# Altium PCB ПСПД.PcbDoc
Units mm, origin at the board's own origin, x right, y up, seen from the top; angles counter-clockwise.
Board outline 111.12 x 93.09 mm, 2 copper layers (Top Layer, Bottom Layer); 30 components, 43 nets, 172 pads, 2 vias.
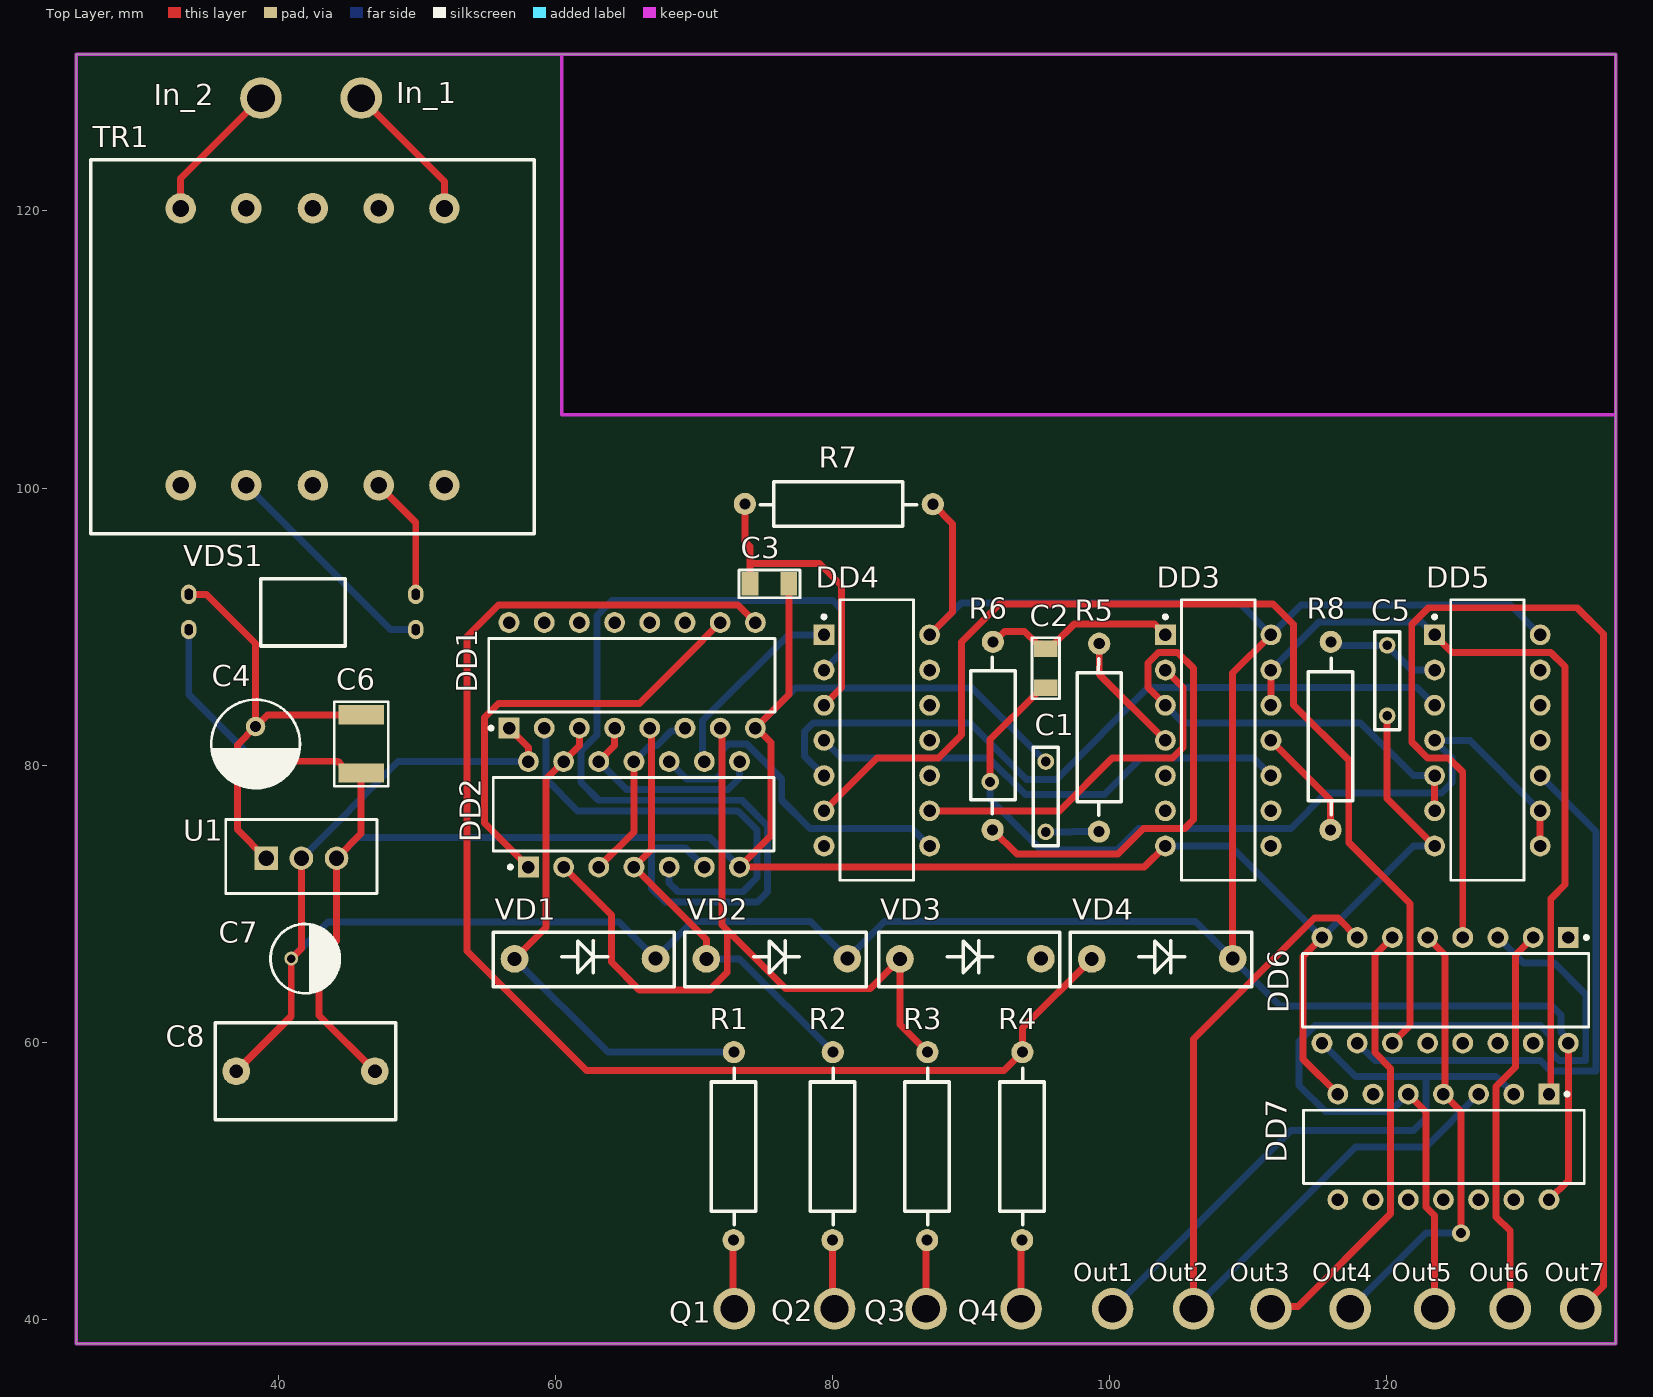
[diagram p0: Top Layer view]
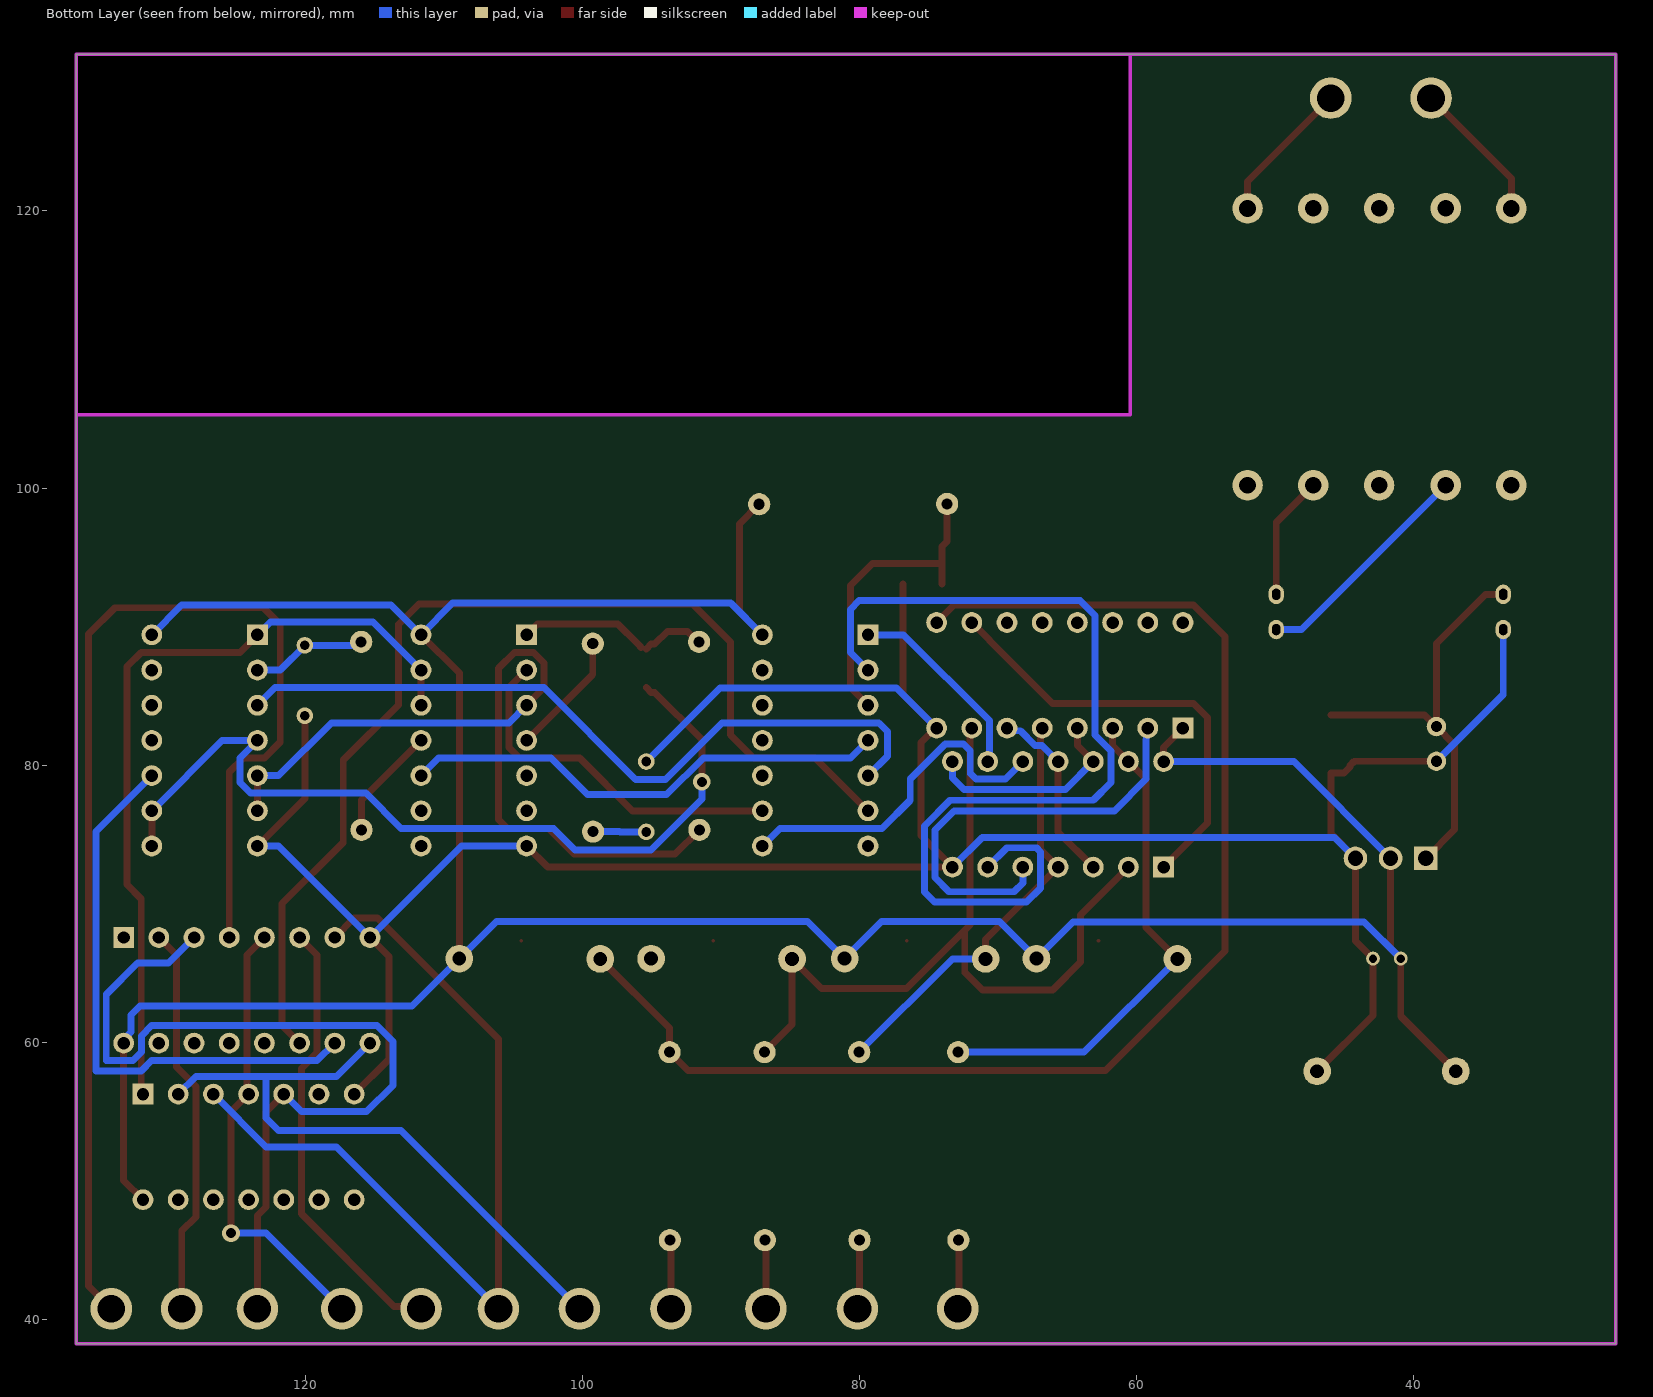
[diagram p1: Bottom Layer view, seen from below]
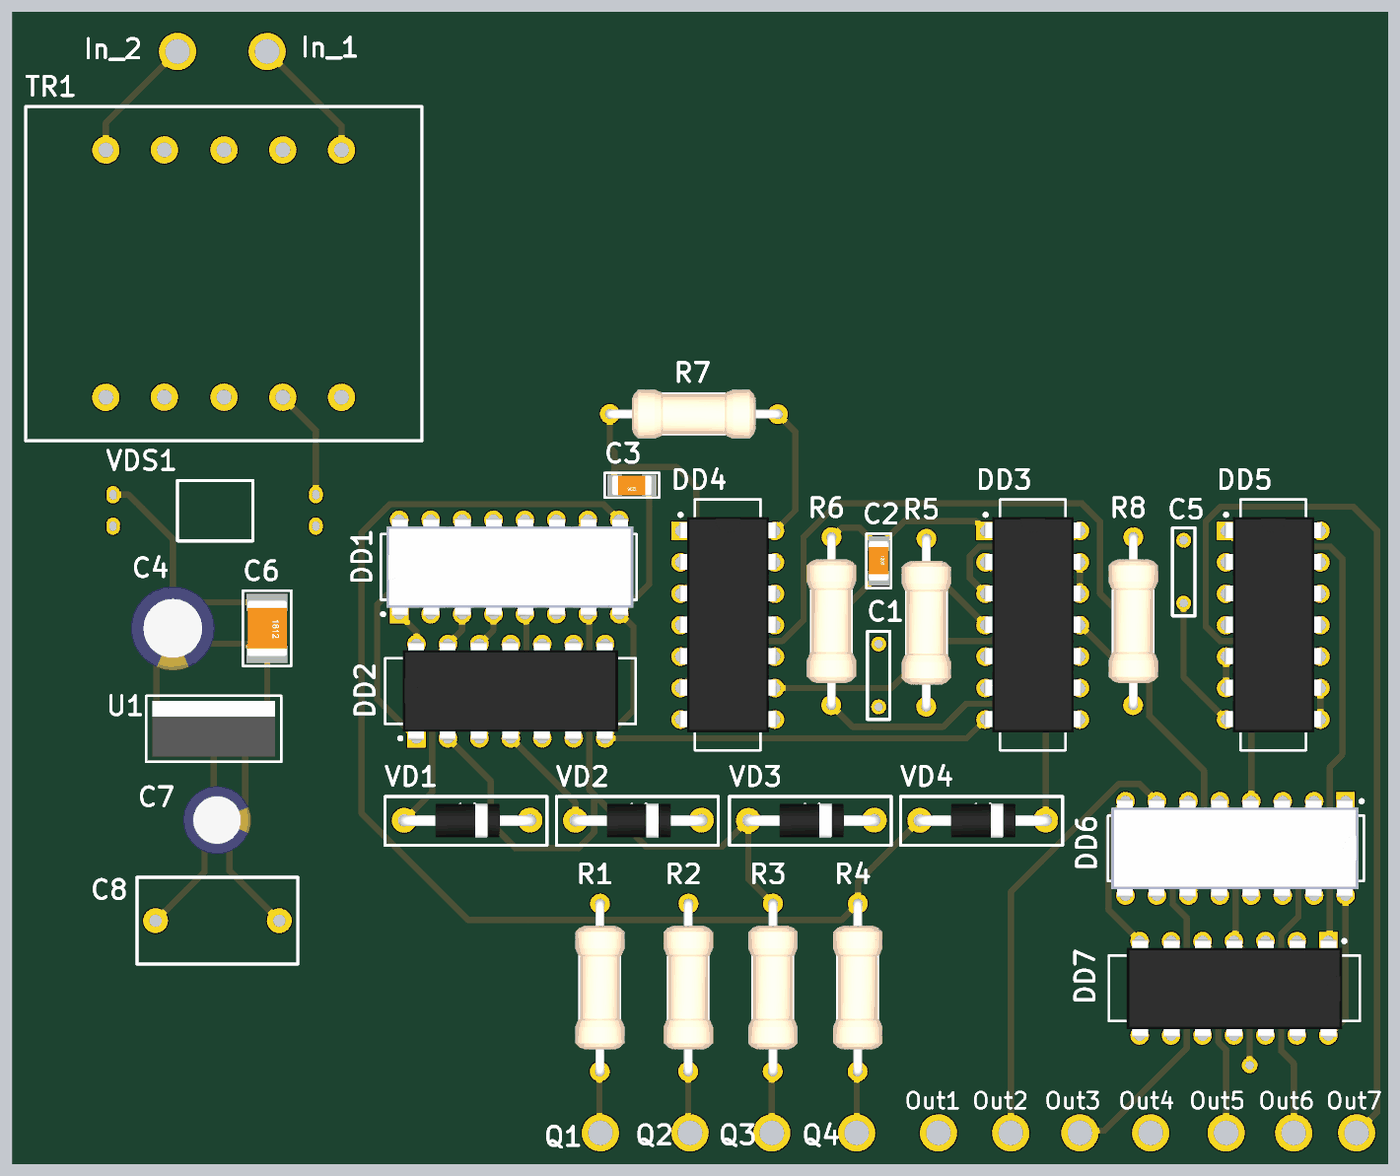
[diagram p2: 3D render of the assembled board from above, using the file's embedded part models]

## Layer stack, top to bottom
Top Solder: solder mask 0.0102, Solder Resist, Dk 3.5
Top Layer: signal copper 0.0356
Dielectric 1: dielectric 0.32, FR-4, Dk 4.8
Bottom Layer: signal copper 0.0356
Bottom Solder: solder mask 0.0102, Solder Resist, Dk 3.5

## Board outline
25.4,38.227 136.525,38.227 136.525,131.318 25.4,131.318
cut-out: 60.452,105.283 60.452,131.318 136.525,131.318 136.525,105.283

## Design rules (kind name [scope] priority, off if disabled: settings)
Clearance [All] p1: gap=0.254 ignorepadtopadclearanceinfootprint=FALSE
Height [All] p1: minheight=0 maxheight=40 prefheight=12.7
PolygonConnect [All] p1: connectstyle=Relief reliefconductorwidth=0.254 reliefentries=4 polygonreliefangle="90 Angle" airgapwidth=0.254
RoutingVias [All] p1: holewidth=0.711 width=1.27 viastyle="Through Hole" minholewidth=0.711 minwidth=1.27 maxholewidth=0.711 maxwidth=1.27
SolderMaskExpansion [All] p1: expansion=0.102 istentingtop=FALSE
Width [All] p1: maxlimit=0.5 minlimit=0.5 preferedwidth=0.5 minimp=50.000000 maximp=50.000000 favimp=50.000000
29 further rules are at their usual default settings.

## Components (designator, comment, footprint, x,y, rotation, side; value= is the part's Value field where it differs from the comment)
C1 "160пФ" 160пФ 95.377,75.184 r90 top
C2 "9.1нФ" 9.1нФ 95.377,86.992 r270 top
C3 "9.1нФ" 9.1нФ 75.438,93.091 r180 top
C4 "12мкФ" 12мкФ 38.354,81.534 r270 top
C5 "160пФ" 160пФ 120.015,88.646 r270 top
C6 "240нФ" 240нФ 45.974,81.534 r270 top
C7 "1.2мкФ" 1.2мкФ 41.926,66.04 r0 top
C8 "24нФ" 24нФ 35.057,52.512 r0 top
DD1 "CD4069UBE" DIP-16 65.532,86.487 r90 top
DD2 "CD4073BE" DIP-14 65.659,76.454 r90 top
DD3 "CD4011BE" DIP-14 107.823,81.788 r0 top
DD4 "CD4025BE" DIP-14 83.185,81.788 r0 top
DD5 "CD4011BE" DIP-14 127.254,81.788 r0 top
DD6 "КР1561ИЕ20" DIP-16 124.206,63.754 r270 top
DD7 "CD4082B" DIP-14 124.079,52.451 r270 top
R1 "220к" Резистор 71.247,57.023 r90 top
R2 "220к" Резистор 78.388,57.023 r90 top
R3 "220к" Резистор 85.217,57.023 r90 top
R4 "220к" Резистор 92.075,57.023 r90 top
R5 "9.1к" Резистор 100.838,77.47 r270 top
R6 "9.1к" Резистор 93.167,77.6 r270 top
R7 "24к" Резистор 84.963,100.457 r0 top
R8 "9.1к" Резистор 114.329,86.634 r90 top
TR1 "ТПК-2, 9В" "ТПК-2, 9В" 42.672,110.49 r0 top
U1 "LM7806" TO-220 41.656,73.279 r0 top
VD1 "1N5818" 1N5818 61.595,66.04 r0 top
VD2 "1N5818" 1N5818 75.438,66.04 r0 top
VD3 "1N5818" 1N5818 89.408,66.04 r0 top
VD4 "1N5818" 1N5818 103.251,66.04 r0 top
VDS1 "2Д906Б" 2Д906Б 40.005,88.519 r0 top

## Footprints (in the part's own frame and the unit in brackets; to place one, negate y for a bottom-side part, rotate by r counter-clockwise, add the part's x,y. Pads: shape width x height; smd on the part's side, far side on the other; paste and mask are expansions set on the pad)
1.2мкФ [mm]
  round 1 hole 0.6: 1(-1,0) 2(1,0)
  silkscreen extent -2.5,-2.5 2.5,2.5, body extent -2.75,-2.74 2.74,2.74, height 12.6
1N5818 [mm]
  round 2 hole 1: 1(-4.554,-0.019) 2(5.62,-0.004)
  Top Layer lines w0.254: 1.143,1.294 1.146,1.298
  silkscreen extent -6.1,-2.03 6.98,1.91, body extent -4.95,-1.4 6.08,1.32, height 3.73
2Д906Б [mm]
  oval 1.1x1.4 hole 0.6 slot 0.8 at 90 deg: 1(-6.477,1.27) 2(-6.477,3.81) 3(9.906,3.81) 4(9.906,1.27)
  silkscreen extent -1.27,0.08 4.83,4.95, body extent -6.65,0 10.08,5.08, height 4.5
9.1нФ [mm]
  rect 1.2x1.7 smd mask+0.065: 1(-1.4,0) 2(1.4,0)
  silkscreen extent -2.2,-1 2.2,1, body extent -1.6,-0.8 1.6,0.8, height 1
12мкФ [mm]
  round 1.4 hole 0.8: 1(-1.25,0) 2(1.25,0)
  silkscreen extent -3.2,-3.2 3.2,3.2, body extent -3.4,-3.4 3.39,3.4, height 12.5
24нФ [mm]
  round 2 hole 1: 1(1.9,5.4) 2(11.9,5.4)
  silkscreen extent 0.4,1.9 13.4,8.9, body extent 0.7,2.4 13.1,8.4, height 16
160пФ [mm]
  round 1.2 hole 0.7: 1(0,0) 2(5.08,0)
  silkscreen extent -1,-0.9 6.1,0.92, body extent -0.25,-0.57 5.33,0.7, height 7.8
240нФ [mm]
  rect 1.4x3.3 smd mask+0.065: 1(-2.1,0) 2(2.1,0)
  silkscreen extent -3.05,-1.95 3.05,1.95, body extent -2.25,-1.6 2.25,1.6, height 1.6
DIP-14 [mm] "DIP; 14 Leads; Row Spacing 7.62 mm; Pitch 2.54 mm"
  rect 1.5x1.5 hole 0.9: 1(-3.81,7.62)
  round 1.5 hole 0.9: 2(-3.81,5.08) 3(-3.81,2.54) 4(-3.81,0) 5(-3.81,-2.54) 6(-3.81,-5.08) 7(-3.81,-7.62) 8(3.81,-7.62) 9(3.81,-5.08) 10(3.81,-2.54) 11(3.81,0) 12(3.81,2.54) 13(3.81,5.08) 14(3.81,7.62)
  silkscreen extent -3.93,-10.1 2.65,10.16, body extent -3.92,-8.67 3.95,8.75, height 4.7
DIP-16 [mm] "DIP; 16 Leads; Row Spacing 7.62 mm; Pitch 2.54 mm"
  rect 1.5x1.5 hole 0.9: 1(-3.81,8.89)
  round 1.5 hole 0.9: 2(-3.81,6.35) 3(-3.81,3.81) 4(-3.81,1.27) 5(-3.81,-1.27) 6(-3.81,-3.81) 7(-3.81,-6.35) 8(-3.81,-8.89) 9(3.81,-8.89) 10(3.81,-6.35) 11(3.81,-3.81) 12(3.81,-1.27) 13(3.81,1.27) 14(3.81,3.81) 15(3.81,6.35) 16(3.81,8.89)
  silkscreen extent -3.93,-10.3 2.65,10.36, body extent -3.94,-10.03 3.93,9.93, height 4.7
TO-220 [mm] "TO, Thru-Hole, Vertical, Heatsink Mounted; 3 In-Line Leads; Pitch 2.54 mm"
  rect 1.7x1.7 hole 1.1: 1(-2.54,0)
  round 1.7 hole 1.1: 2(2.54,0) 3(0,0)
  silkscreen extent -5.46,-2.54 5.46,2.79, body extent -4.95,-2.1 4.95,2.4, height 24.8
Резистор [mm]
  round 1.6 hole 0.8: 1(-11.3,-1.6) 2(2.266,-1.622)
  silkscreen extent -10.2,-3.2 1.1,0, body extent -11.64,-3.6 2.61,0.39, height 5.6
"ТПК-2, 9В" [mm]
  round 2.2 hole 1.2: 1(9.311,9.69) 2(4.565,9.697) 3(-0.183,9.7) 4(-5,9.703) 5(-9.729,9.69) 6(-9.729,-10.292) 7(-5,-10.28) 8(-0.183,-10.282) 9(4.565,-10.286) 10(9.311,-10.292)
  silkscreen extent -16.2,-13.8 15.8,13.2, body extent -16.2,-13.8 15.8,13.2, height 32

## Part data
C1 C2 C3 C5 C6 C8: library part Конденсатор
C4 C7: library part "Электролитический конднсатор"
DD1: "Не"
DD2: "3И"
DD3 DD5: "2И-НЕ"
DD4: "3ИЛИ-НЕ"
DD6: "Счётчик"
DD7: "4И"
R1 R2 R3 R4 R5 R6 R7 R8: library part "CF-50 (С1-4)", "Резистор"
TR1: "Трансформатор"
U1: "Стабилизатор"
VD1 VD2 VD3 VD4: "Диод"
VDS1: "Диодный мост"

## Free pads (board coordinates)
  round 3 hole 2: 4(38.735,128.143) 4(45.974,128.143) 4(72.898,40.767) 4(80.137,40.767) 4(86.741,40.767) 4(93.599,40.767) 4(100.203,40.767) 4(106.045,40.767) 4(111.633,40.767) 4(117.348,40.767) 4(123.444,40.767) 4(128.905,40.767) 4(133.985,40.767)

## Via types
v1: diameter 1.27, hole 0.711, Top Layer to Bottom Layer, 2 vias

## Nets (pads, with @x,y where several pads share a name; then routed paths per layer and width w, separated by ;. In a path a pad name is that pad's centre, name@x,y a point inside that pad or via, vN(x,y) a via of type N, cw(c..) or ccw(c..) an arc to the next point about the centre after c; other vN are vias at no path point)
+6: C7.1 C8.1 DD1.1 DD2.14 DD3.14 DD4.14 DD5.14 DD6.16 DD7.14 R7.2 U1.3 VD1.2 VD2.2 VD4.2 | length 236.6
  Top Layer w0.5: C8.1 40.926,61.881 C7.1 41.656,66.77 U1.3 ; DD1.1 58.039,81.28 DD2.14 ; DD4.14 88.646,91.059 88.646,97.418 R7.2 ; VD4.2 108.871,86.646 DD3.14 ; DD7.14 133.096,50.038 DD6.16
  Bottom Layer w0.5: C7.1 43.568,68.682 64.57,68.682 VD1.2 69.886,68.707 78.388,68.707 VD2.2 83.729,68.707 106.201,68.707 VD4.2 112.297,62.611 131.914,62.611 132.564,61.961 132.564,60.737 133.096,60.205 DD6.16 ; U1.3 48.641,80.264 DD2.14 ; DD4.14 89.281,91.694 109.347,91.694 DD3.14 113.792,91.567 128.905,91.567 DD5.14
GND: C1.2 C3.1 C4.2 C5.2 C6.2 C7.2 C8.2 DD1.8 DD2.7 DD3.7 DD5.7 DD6.8 DD7.7 U1.2 VDS1.1 | length 201.9
  Top Layer w0.5: C4.2 44.281,80.284 44.574,79.991 44.574,79.884 45.024,79.434 C6.2 45.974,75.057 U1.2 44.196,67.31 C7.2 42.926,61.943 C8.2 ; C3.1 76.838,85.093 DD1.8 74.518,82.677 75.565,81.63 75.565,74.93 DD2.7 102.489,72.644 DD3.7 ; DD6.8 113.944,66.192 113.944,58.776 DD7.7 ; C5.2 120.015,77.597 DD5.7
  Bottom Layer w0.5: VDS1.1 33.528,85.11 C4.2 ; U1.2 45.712,74.795 71.128,74.795 DD2.7 ; DD1.8 77.327,85.582 90.059,85.582 C1.2 ; DD3.7 108.712,74.168 DD6.8 121.92,74.168 DD5.7
In_1: pad.4@45.974,128.143 TR1.1 | length 10.5
  Top Layer w0.5: pad.4@45.974,128.143 51.983,122.134 TR1.1
In_2: pad.4@38.735,128.143 TR1.5 | length 10.4
  Top Layer w0.5: TR1.5 32.943,122.351 pad.4@38.735,128.143
NetC1_1: C1.1 R5.2 | length 3.8
  Bottom Layer w0.5: C1.1 97.282,75.184 97.302,75.204 R5.2
NetC2_1: C2.1 DD3.1 R6.1 | length 13.9
  Top Layer w0.5: R6.1 91.648,88.9 92.41,89.662 93.853,89.662 94.773,88.742 95.027,88.742 C2.1 ; C2.1@95.747,88.508 95.747,88.512 95.977,88.742 95.981,88.742 97.434,90.195 103.226,90.195 DD3.1
NetC2_2: C2.2 DD5.4 DD5.8 DD5.9 | length 62.6
  Top Layer w0.5: v1(91.364,78.791) 91.364,81.839 94.767,85.242 95.027,85.242 C2.2 ; DD5.8 DD5.9
  Bottom Layer w0.5: v1(91.364,78.791) 91.364,77.546 95.021,73.889 100.508,73.889 102.057,75.438 113.081,75.438 115.621,77.978 123.952,77.978 124.714,78.74 124.714,80.518 DD5.4 125.984,81.788 DD5.9
NetC3_2: C3.2 DD4.3 R7.1 | length 22.4
  Top Layer w0.5: R7.1 73.663,96.158 74.038,95.783 74.038,94.564 ; C3.2 74.038,94.564 ; DD4.3 80.645,85.598 80.645,92.964 79.045,94.564 74.038,94.564
NetC4_1: C4.1 C6.1 U1.1 VDS1.2 | length 31.2
  Top Layer w0.5: VDS1.2 34.798,92.329 38.354,88.773 C4.1 ; U1.1 37.033,75.362 37.033,81.463 C4.1 ; C6.1 39.204,83.634 C4.1
NetC5_1: C5.1 DD5.2 R8.2 | length 8.4
  Bottom Layer w0.5: R8.2 R8.2@116.161,88.69 ; R8.2@116.056,88.646 C5.1 121.793,86.868 DD5.2
NetDD1_2: DD1.2 DD2.5 | length 32.1
  Bottom Layer w0.5: DD1.2 59.309,81.788 59.309,78.994 61.595,76.708 73.152,76.708 74.549,75.311 74.549,71.882 73.533,70.866 68.834,70.866 68.199,71.501 DD2.5
NetDD1_3: DD1.3 DD2.13 R1.2 VD1.1 | length 37.2
  Top Layer w0.5: VD1.1 59.309,68.289 59.309,78.994 DD2.13 61.722,81.407 DD1.3
  Bottom Layer w0.5: VD1.1 63.773,59.289 R1.2
NetDD1_4: DD1.4 DD2.8 DD2.12 | length 15.4
  Top Layer w0.5: DD2.12 64.262,81.407 DD1.4
  Bottom Layer w0.5: DD2.12 65.127,78.256 72.449,78.256 73.279,79.086 DD2.8
NetDD1_5: DD1.5 DD2.4 R2.2 VD2.1 | length 31.3
  Top Layer w0.5: DD1.5@66.929,82.677 66.929,73.914 DD2.4 70.884,67.419 VD2.1
  Bottom Layer w0.5: VD2.1 73.278,66.021 R2.2
NetDD1_6: DD1.6 DD2.3 DD2.11 | length 13.4
  Top Layer w0.5: DD2.3 65.659,75.184 DD2.11
  Bottom Layer w0.5: DD2.11 66.818,81.423 67.321,81.423 68.384,82.486 69.151,82.486 DD1.6
NetDD1_7: DD1.7 DD2.2 R3.2 VD3.1 | length 58.2
  Top Layer w0.5: DD2.2 64.033,69.19 64.033,65.786 66.04,63.779 71.12,63.779 72.39,65.049 72.39,67.843 ; DD1.7@72.009,82.677 72.009,68.453 76.581,63.881 82.714,63.881 VD3.1 84.854,61.274 R3.2
NetDD1_9: DD1.9 R4.2 VD4.1 | length 98
  Top Layer w0.5: DD1.9 73.152,91.567 55.88,91.567 53.594,89.281 53.594,66.599 62.23,57.963 92.371,57.963 R4.2 93.697,61.021 VD4.1
NetDD1_10: DD1.10 DD2.1 | length 32
  Top Layer w0.5: DD2.1 54.864,75.819 54.864,83.439 55.88,84.455 66.065,84.455 70.612,89.002 70.612,89.027 DD1.10
NetDD2_6: DD2.6 DD4.2 | length 71.5
  Bottom Layer w0.5: DD2.6 69.342,74.041 67.222,74.041 66.929,73.748 66.929,71.12 67.937,70.112 74.568,70.112 75.303,70.847 75.303,75.623 73.456,77.47 63.119,77.47 61.849,78.74 61.849,81.031 62.992,82.174 62.992,90.805 64.059,91.872 80.01,91.872 80.645,91.237 80.645,88.138 DD4.2
NetDD2_9: DD2.9 DD4.1 | length 14.3
  Bottom Layer w0.5: DD2.9 70.612,80.391 70.612,83.21 76.81,89.408 DD4.1
NetDD2_10: DD2.10 DD4.8 | length 25.2
  Bottom Layer w0.5: DD2.10 69.453,79.01 71.594,79.01 71.993,79.409 71.993,81.015 72.496,81.518 73.798,81.518 76.327,78.989 76.327,77.47 78.359,75.438 85.725,75.438 DD4.8
NetDD3_2: DD3.2 DD4.9 | length 26.3
  Top Layer w0.5: DD4.9 96.368,76.708 100.178,80.518 104.521,80.518 105.283,81.28 105.283,85.598 DD3.2
NetDD3_3: DD3.3 DD5.5 DD5.6 R6.2 | length 58.9
  Top Layer w0.5: R6.2 93.295,73.584 100.584,73.584 102.438,75.438 105.41,75.438 106.045,76.073 106.045,86.995 104.902,88.138 103.505,88.138 102.743,87.376 102.743,85.598 DD3.3 ; DD5.6 DD5.5
  Bottom Layer w0.5: DD3.3 105.283,83.058 118.11,83.058 121.92,79.248 DD5.5
NetDD3_4: DD3.4 R5.1 | length 9
  Top Layer w0.5: R5.1 99.238,86.563 DD3.4
NetDD3_10: DD3.10 DD4.4 | length 35.5
  Bottom Layer w0.5: DD4.4 80.645,80.518 91.262,80.518 93.904,77.876 99.619,77.876 102.26,80.518 110.363,80.518 DD3.10
NetDD3_11: DD3.11 R8.1 | length 8.2
  Top Layer w0.5: DD3.11 115.929,77.492 R8.1
NetDD3_12: DD3.12 DD3.13 DD5.1 DD7.1 | length 57.9
  Top Layer w0.5: DD3.12 DD3.13 ; DD5.1 124.714,88.138 131.826,88.138 132.842,87.122 132.842,71.374 131.826,70.358 131.826,56.261 DD7.1
  Bottom Layer w0.5: DD3.13 115.113,90.348 122.504,90.348 DD5.1
NetDD4_5: DD4.5 DD5.3 | length 54.4
  Bottom Layer w0.5: DD4.5 77.978,80.645 77.978,82.423 78.597,83.042 89.907,83.042 93.98,78.969 96.139,78.969 102.768,85.598 122.174,85.598 DD5.3
NetDD4_6: DD4.6 DD6.11 | length 78.8
  Top Layer w0.5: DD4.6 83.185,80.518 87.63,80.518 89.306,82.194 89.306,88.9 92.05,91.643 111.785,91.643 113.259,90.17 113.259,84.353 117.246,80.366 117.246,74.422 121.666,70.002 121.666,61.214 DD6.11
NetDD5_10: DD5.10 DD6.10 | length 41.1
  Bottom Layer w0.5: DD6.10 119.126,58.674 131.088,58.674 131.826,57.936 135.104,57.936 135.104,75.208 DD5.10
NetTR1_7: TR1.7 VDS1.4 | length 16.6
  Bottom Layer w0.5: TR1.7 48.093,89.789 VDS1.4
NetTR1_9: TR1.9 VDS1.3 | length 9
  Top Layer w0.5: TR1.9 49.911,97.53 VDS1.3
Out1: DD6.9 DD7.2 pad.4@100.203,40.767 | length 46.7
  Bottom Layer w0.5: pad.4@100.203,40.767 113.081,53.645 121.92,53.645 122.809,54.534 122.809,57.531 ; DD6.9 117.729,57.531 122.809,57.531 ; DD7.2 127.889,57.531 122.809,57.531
Out2: DD6.7 DD7.3 pad.4@106.045,40.767 | length 62.5
  Top Layer w0.5: pad.4@106.045,40.767 106.045,60.223 114.783,68.961 116.459,68.961 DD6.7
  Bottom Layer w0.5: pad.4@106.045,40.767 117.729,52.451 122.809,52.451 DD7.3
Out3: DD6.6 pad.4@111.633,40.767 | length 32.4
  Top Layer w0.5: pad.4@111.633,40.767 111.812,40.946 113.59,40.946 120.269,47.625 120.269,58.115 119.126,59.258 119.126,66.294 DD6.6
Out4: DD6.5 DD7.4 pad.4@117.348,40.767 | length 32.7
  Top Layer w0.5: DD6.5 124.206,66.294 124.206,56.388 DD7.4 125.349,54.991 v1(125.349,46.228)
  Bottom Layer w0.5: pad.4@117.348,40.767 122.809,46.228 v1(125.349,46.228)
Out5: DD6.3 DD7.5 pad.4@123.444,40.767 | length 64.3
  Top Layer w0.5: DD7.5 122.825,54.975 122.825,48.122 123.444,47.503 pad.4@123.444,40.767
  Bottom Layer w0.5: DD7.5 120.269,54.991 115.57,54.991 113.665,56.896 113.665,60.066 114.797,61.198 131.075,61.198 131.81,60.463 131.81,59.309 132.429,58.69 134.35,58.69 134.35,63.453 132.08,65.723 129.857,65.723 DD6.3
Out6: DD6.2 pad.4@128.905,40.767 | length 28.3
  Top Layer w0.5: pad.4@128.905,40.767 128.905,46.38 127.889,47.396 127.889,56.82 129.286,58.217 129.286,66.294 DD6.2
Out7: DD6.4 pad.4@133.985,40.767 | length 89.5
  Top Layer w0.5: DD6.4 125.476,79.502 124.46,80.518 122.936,80.518 121.793,81.661 121.793,90.17 122.987,91.364 133.731,91.364 135.636,89.459 135.636,42.418 pad.4@133.985,40.767
Q1: pad.4@72.898,40.767 R1.1 | length 5
  Top Layer w0.5: R1.1 72.822,45.723 72.822,40.843 pad.4@72.898,40.767
Q2: pad.4@80.137,40.767 R2.1 | length 5
  Top Layer w0.5: R2.1 79.988,40.916 pad.4@80.137,40.767
Q3: pad.4@86.741,40.767 R3.1 | length 5
  Top Layer w0.5: pad.4@86.741,40.767 86.741,45.723 R3.1
Q4: pad.4@93.599,40.767 R4.1 | length 5
  Top Layer w0.5: pad.4@93.599,40.767 93.599,45.723 R4.1
pads on no net: DD1.11 DD1.12 DD1.13 DD1.14 DD1.15 DD1.16 DD3.5 DD3.6 DD3.8 DD3.9 DD4.7 DD4.10 DD4.11 DD4.12 DD4.13 DD5.11 DD5.12 DD5.13 DD6.1 DD6.12 DD6.13 DD6.14 DD6.15 DD7.6 DD7.8 DD7.9 DD7.10 DD7.11 DD7.12 DD7.13 TR1.2 TR1.3 TR1.4 TR1.6 TR1.8 TR1.10 VD3.2

## Keep-outs
Keep-Out Layer:
  lines w0.254: 60.452,131.318 136.525,131.318 136.525,105.283 ; 60.452,131.318 60.452,105.283 136.525,105.283 ; 60.452,131.318 25.4,131.318 25.4,38.227 136.525,38.227 136.525,105.283

## Silkscreen, mask and mechanical layers (free items; w line width, h text height)
Top Overlay:
  text "In_1" at 48.514,127.762 h1.52
  text "In_2" at 30.988,127.635 h1.52
  text "Out1" at 97.355,42.745 h1.3
  text "Out2" at 102.816,42.745 h1.3
  text "Out3" at 108.658,42.745 h1.3
  text "Out4" at 114.627,42.745 h1.3
  text "Out5" at 120.342,42.745 h1.3
  text "Out6" at 125.93,42.745 h1.3
  text "Out7" at 131.391,42.745 h1.3
  text "Q2" at 75.565,39.878 h1.52
  text "Q3" at 82.296,39.878 h1.52
  text "Q4" at 89.027,39.878 h1.52
  text "Q1" at 68.199,39.751 h1.52